# Altium PCB STM32F051C6 Lite Development Board.PcbDoc
Units mil, origin at the board's own origin, x right, y up, seen from the top; angles counter-clockwise.
Board outline 3200.23 x 1149.97 mil, 2 copper layers (Top Layer, Bottom Layer); 16 components, 46 nets, 136 pads, 0 vias.
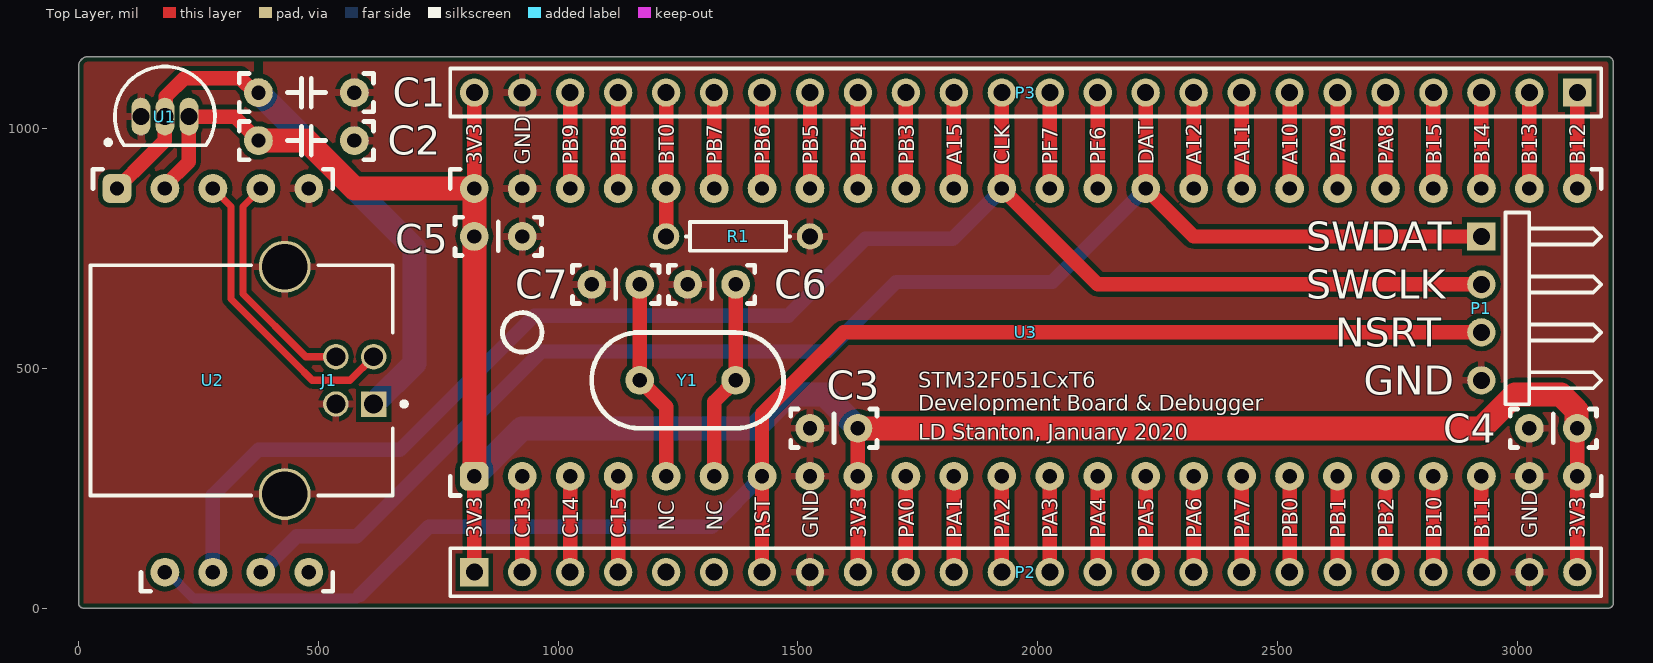
[diagram p0: Top Layer view]
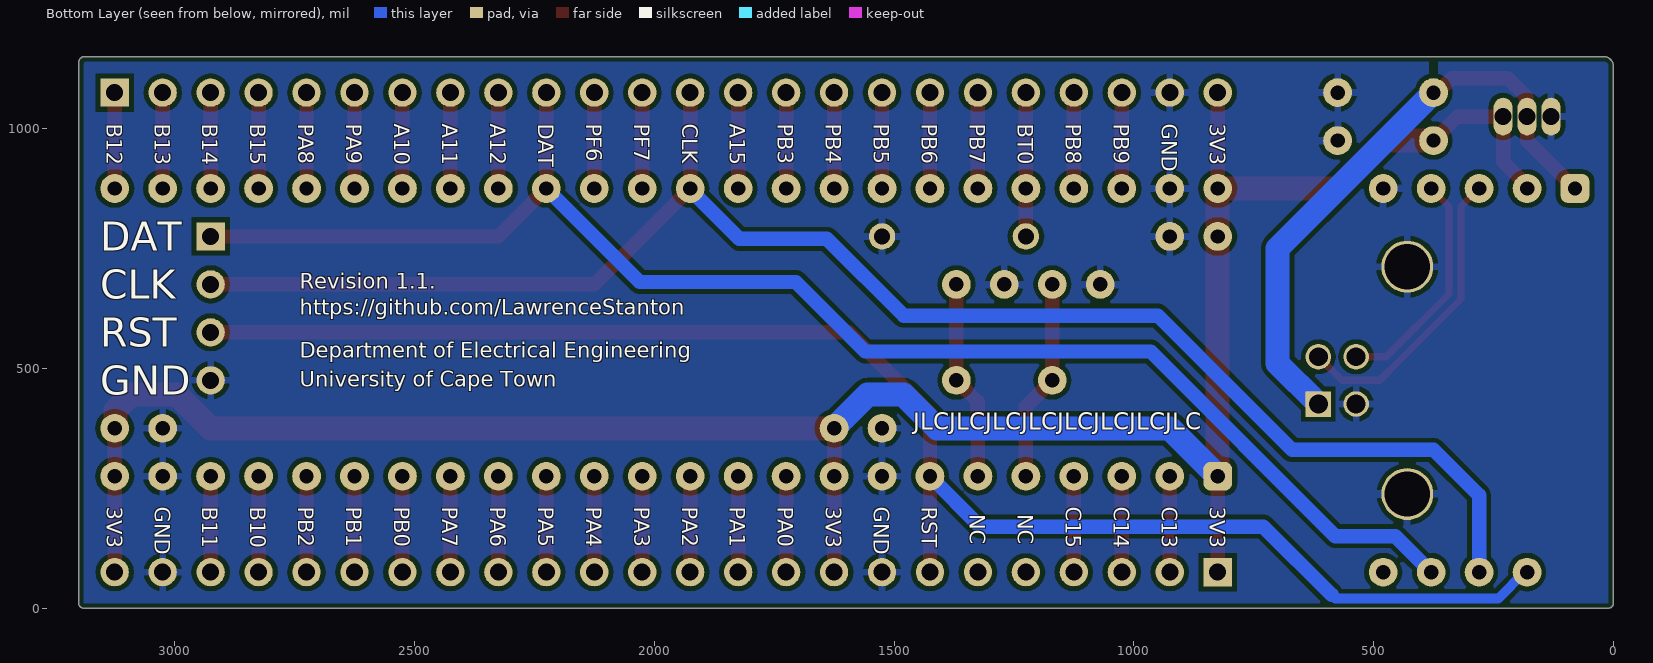
[diagram p1: Bottom Layer view, seen from below]

## Layer stack, top to bottom
Top Solder: solder mask 0.4, Solder Resist, Dk 3.5
Top Layer: signal copper 1.4
Dielectric 1: dielectric 12.6, FR-4, Dk 4.8
Bottom Layer: signal copper 1.4
Bottom Solder: solder mask 0.4, Solder Resist, Dk 3.5

## Board outline
0,10 ccw(c10,10) 10,0 3190,0 ccw(c3190,10) 3200,10 3200,1135 ccw(c3187.52,1137.48) 3190,1149.97 20,1149.97 ccw(c19.98,1129.98) 0,1130

## Design rules (kind name [scope] priority, off if disabled: settings)
BoardOutlineClearance [All] p1: gap=10 ignorepadtopadclearanceinfootprint=FALSE except(0: Arc-SplitContinuation Track-SplitContinuation SMDPad-SplitContinuation THPad-SplitContinuation Via-SplitContinuation Fill-SplitContinuation Poly-SplitContinuation Region-SplitContinuation Text-SplitContinuation)
Clearance [All] p1: gap=10 ignorepadtopadclearanceinfootprint=FALSE except(0: Arc-Text Track-Text SMDPad-Hole THPad-Hole Via-Hole Fill-Hole Poly-Hole Region-Hole Text-Hole; 1: Text-Text; 3: THPad-Text Via-Text; 5: Arc-THPad Arc-Hole Track-THPad Track-Hole Fill-Text Poly-Text Region-Text)
ComponentClearance [All] p1 off: gap=9 collisioncheckmode=3 verticalgap=0 showdistances=FALSE
DiffPairsRouting [All] p1: maxlimit=10 minlimit=10 mostfreqgap=10 toplayer_minwidth=15 toplayer_maxwidth=15 toplayer_prefwidth=15 bottomlayer_minwidth=15 bottomlayer_maxwidth=15 bottomlayer_prefwidth=15 maxuncoupledlength=500
Height [All] p1 off: minheight=0 maxheight=1000 prefheight=500
HoleSize [All] p1: absolutevalues=TRUE maxlimit=248.03 minlimit=7.87 maxpercent=80.000 minpercent=20.000
MinimumAnnularRing [All] p1: minimumring=3
PermittedLayers [All] p1: toplayerpermitted=TRUE bottomlayerpermitted=FALSE
PlaneConnect [All] p1: planeconnectstyle=Relief reliefexpansion=20 reliefentries=4 reliefconductorwidth=20 reliefairgap=10
PolygonConnect [All] p1: connectstyle=Relief reliefconductorwidth=15 reliefentries=4 polygonreliefangle="90 Angle" airgapwidth=10
RoutingCorners [All] p1: cornerstyle=Round minsetback=100 maxsetback=100
RoutingTopology [All] p1: topology=Starburst
RoutingVias [All] p1: holewidth=28 width=50 viastyle="Through Hole" minholewidth=11.81 minwidth=17.72 maxholewidth=28 maxwidth=50
SilkToSolderMaskClearance [IsPad] p1: minsilkscreentomaskgap=9 clearancetoexposedcopper=TRUE
SolderMaskExpansion [All] p1: expansion=4 istentingtop=FALSE
UnRoutedNet [All] p1: checkbadconnections=TRUE
Width [All] p1: maxlimit=50 minlimit=5 preferedwidth=30 minimp=50.000000 maximp=50.000000 favimp=50.000000
21 further rules are at their usual default settings.

## Classes and differential pairs
differential pair USB: +USB_P -USB_N

## Components (designator, comment, footprint, x,y, rotation, side; value= is the part's Value field where it differs from the comment)
C1 "Ceramic Capacitor" "200MIL CAPACITOR THT" 475,1075 r270 top locked value=1uF
C2 "Ceramic Capacitor" "200MIL CAPACITOR THT" 475,975 r270 top locked value=1uF
C3 "Ceramic Capacitor" "100MIL CAPACITOR THT" 1575,375 r270 top locked value=100nF
C4 "Ceramic Capacitor" "100MIL CAPACITOR THT" 3075,375 r270 top locked value=100nF
C5 "Ceramic Capacitor" "100MIL CAPACITOR THT" 875,775 r90 top locked value=100nF
C6 "Ceramic Capacitor" "100MIL CAPACITOR THT" 1320,675 r270 top locked value=10pF
C7 "Ceramic Capacitor" "100MIL CAPACITOR THT" 1120,675 r270 top locked value=10pF
J1 "61729-0010BLF" FCI-61729-0010BLF-6_V 340,475 r270 top locked
P1 "SWD Header" HDR1X4H 2925,775 r270 top locked
P2 "Jumper Headers" HDR1X24 825,75 r0 top locked
P3 "Jumper Headers" HDR1X24 3125,1075 r180 top locked
R1 "BOOT PDR" AXIAL-0.3 1375,775 r0 top locked value=10K
U1 "MCP1700-3302E/TO" TO-92-TO3 180,1025 r270 top
U2 "STM32F1 Debugger" "STM DEBUGGER" 80,75 r0 top locked
U3 "STM32F051C6T6 Baracuda Breakout" "STM32F051C6T6 BARACUDA BREAKOUT" 1975,575 r0 top locked
Y1 "8MHz" "200MIL FLAT QUARTS CRYSTAL THT" 1270,475 r180 top locked

## Footprints (in the part's own frame and the unit in brackets; to place one, negate y for a bottom-side part, rotate by r counter-clockwise, add the part's x,y. Pads: shape width x height; smd on the part's side, far side on the other; paste and mask are expansions set on the pad)
"100MIL CAPACITOR THT" [mil] "100mil THT Bipolar Capacitor"
  round 60 hole 30: 1(0,50) 2(0,-50)
  silkscreen extent -40,-90 40,90
"200MIL CAPACITOR THT" [mil] "200mil THT Bipolar Capacitor"
  round 60 hole 30: 1(0,-100) 2(0,100)
  silkscreen extent -40,-140 40,140
"200MIL FLAT QUARTS CRYSTAL THT" [mil] "Standard Ovular Quarts Crystal"
  round 60 hole 30: 1(-100,0) 2(100,0)
  Top Layer pour cut-out: -150,50
  silkscreen extent -200,-100 200,100
AXIAL-0.3 [mm] "Axial Device, Thru-Hole; 2 Leads; 0.3 in Pin Spacing"
  round 1.4 hole 0.85: 1(-3.81,0) 2(3.81,0)
  silkscreen extent -2.77,-0.76 2.77,0.76
FCI-61729-0010BLF-6_V [mm] "Through Hole, 6-Leads, Body 12.2x16mm"
  rect 1.35x1.35 hole 1: 1(1.254,6.99)
  round 1.35 hole 1: 2(-1.246,6.99) 3(-1.246,4.99) 4(1.254,4.99)
  round 2.75 hole 2.4: MH1(-6.016,2.28) MH2(6.024,2.28)
  silkscreen extent -6.1,-8 6.1,8.72, body extent -7.17,-8 7.17,8, height 11.14
HDR1X4H [mm] "Connector; Header; 4 Position; Right Angle"
  rect 1.5x1.5 hole 0.9: 1(0,0)
  round 1.5 hole 0.9: 2(2.54,0) 3(5.08,0) 4(7.62,0)
  silkscreen extent -1.27,1.27 8.89,6.35
HDR1X24 [mm] "Connector; Header; 24 Position"
  rect 1.5x1.5 hole 0.9: 1(0,0)
  round 1.5 hole 0.9: 2(2.54,0) 3(5.08,0) 4(7.62,0) 5(10.16,0) 6(12.7,0) 7(15.24,0) 8(17.78,0) 9(20.32,0) 10(22.86,0) 11(25.4,0) 12(27.94,0) 13(30.48,0) 14(33.02,0) 15(35.56,0) 16(38.1,0) 17(40.64,0) 18(43.18,0) 19(45.72,0) 20(48.26,0) 21(50.8,0) 22(53.34,0) 23(55.88,0) 24(58.42,0)
  silkscreen extent -1.27,-1.27 59.69,1.27
"STM32F051C6T6 BARACUDA BREAKOUT" [mil] "Breakout Board Footprint for STN32F051C6T6"
  rrect50% 60x60 hole 30: 1(-1150,-300)
  round 60 hole 30: 2(-1050,-300) 3(-950,-300) 4(-850,-300) 5(-750,-300) 6(-650,-300) 7(-550,-300) 8(-450,-300) 9(-350,-300) 10(-250,-300) 11(-150,-300) 12(-50,-300) 13(50,-300) 14(150,-300) 15(250,-300) 16(350,-300) 17(450,-300) 18(550,-300) 19(650,-300) 20(750,-300) 21(850,-300) 22(950,-300) 23(1050,-300) 24(1150,-300) 25(1150,300) 26(1050,300) 27(950,300) 28(850,300) 29(750,300) 30(650,300) 31(550,300) 32(450,300) 33(350,300) 34(250,300) 35(150,300) 36(50,300) 37(-50,300) 38(-150,300) 39(-250,300) 40(-350,300) 41(-450,300) 42(-550,300) 43(-650,300) 44(-750,300) 45(-850,300) 46(-950,300) 47(-1050,300) 48(-1150,300)
  silkscreen extent -1200,-340 1200,340
"STM DEBUGGER" [mil] "STM32F1 Debugger Module"
  rrect50% 60x60 hole 30: 1(0,800)
  round 60 hole 30: 2(100,800) 3(200,800) 4(300,800) 5(400,800) 6(100,0) 7(200,0) 8(300,0) 9(400,0)
  silkscreen extent -50,-40 450,840
TO-92-TO3 [mm] "TO, Flat Index; 3 In-Line, Axial Leads; Body Dia. 4.8mm; Leads 0.56 x 0.53 mm (max)"
  oval 2x1 hole 0.9: 1(0,-1.27) 2(0,0) 3(0,1.27)
  silkscreen extent -2.65,-3.13 1.52,2.65, body extent -2.65,-2.66 1.52,2.66, height 5.33

## Part data
C1 C2 C3 C4 C5 C6 C7: library part Cap, "Capacitor", LatestRevisionDate=17-Jul-2002, LatestRevisionNote="Re-released for DXP Platform.", PackageDescription="Radial Cap, Thru-Hole; 2 Leads; 0.3 in Pin Spacing", PackageReference=RAD-0.3, Published=8-Jun-2000, Publisher="Altium Limited"
J1: library part CMP-0397-00002-2, "Single USB 2.0, B Type, Right Angle Jack, Through Hole, RoHS, Tube", Manufacturer="FCI Electronics", ComponentLink1Description="Manufacturer URL", ComponentLink1URL=http://portal.fciconnect.com/, ComponentLink2Description=Datasheet, ComponentLink2URL=http://portal.fciconnect.com/Comergent//fci/drawing/61729.pdf, ComponentLink3Description="Package Specification", ComponentLink3URL=http://portal.fciconnect.com/Comergent//fci/drawing/61729.pdf, Connector Type=USB-B, DatasheetVersion="Rev. V", Gender=Receptacle, Mounting Technology="Through Hole", Number of Contacts=4, PackageDescription="6-Pin, Through Hole, Body 12.2 x 16 mm", PackageReference=61729-0010BLF, Packing=Tube, PartNumber=61729-0010BLF, RoHS=TRUE, Specifications="USB 2.0"
P1: library part "Header 4H", "Header, 4-Pin, Right Angle", LatestRevisionDate=17-Jul-2002, LatestRevisionNote="Re-released for DXP Platform.", Publisher="Altium Limited"
P2 P3: library part "Header 24", "Header, 24-Pin", LatestRevisionDate=17-Jul-2002, LatestRevisionNote="Re-released for DXP Platform.", Publisher="Altium Limited"
R1: library part Res1, "Resistor", LatestRevisionDate=17-Jul-2002, LatestRevisionNote="Re-released for DXP Platform.", PackageDescription="Axial Device, Thru-Hole; 2 Leads; 0.3 in Pin Spacing", PackageReference=AXIAL-0.3, Published=8-Jun-2000, Publisher="Altium Limited"
U1: "Low Quiescent Current LDO, 3-Pin TO-92, Extended TemperatureBAG", Supplier Part Number 1=MCP1700-3302E/TO-ND, ComponentLink1Description=Datasheet, ComponentLink1URL=http://ww1.microchip.com/downloads/en/DeviceDoc/21826b.pdf, ComponentLink2Description="Packaging Specification", ComponentLink2URL=http://www.microchip.com/stellent/groups/techpub_sg/documents/packagingspec/en012702.pdf, ComponentLink3Description="Microchip.com Home", ComponentLink3URL=http://www.microchip.com/, DatasheetVersion="revB, Feb-2007", PackageDescription="3-Lead Plastic Transistor Outline (TO) [TO-92]", PackageReference=TO-92-TO3, PackageVersion="revBB, Aug-2009", Published=29-Jan-2009, Publisher="Altium Limited", Supplier 1=Digi-Key, Supplier 2=Farnell, Supplier Part Number 2=1296588
Y1: library part XTAL, "Crystal Oscillator", LatestRevisionDate=17-Jul-2002, LatestRevisionNote="Re-released for DXP Platform.", PackageDescription="Crystal, Thru-Hole; 2 Leads; Body 3.1 x 8.2 mm (Dia.xH)", PackageReference=R38, Published=8-Jun-2000, Publisher="Altium Limited"

## Nets (pads, with @x,y where several pads share a name; then routed paths per layer and width w, separated by ;. In a path a pad name is that pad's centre, name@x,y a point inside that pad or via, vN(x,y) a via of type N, cw(c..) or ccw(c..) an arc to the next point about the centre after c; other vN are vias at no path point)
+3V3: C2.1 C3.1 C4.1 C5.1 P2.1 P2.9 P2.24 P3.24 U1.3 U2.2 U3.1 U3.9 U3.24 U3.48 | length 4906.2
  Top Layer w30: U2.2 180,881.07 230,931.07 U1.3 325,1025 C2.1 ; P2.1 U3.1 ; U3.48 P3.24 ; P2.9 U3.9 C3.1 ; P2.24 U3.24 C4.1
  Top Layer w50: C2.1 475,975 575,875 U3.48 C5.1 U3.1 ; C3.1 2925,375 2995,445 3090.71,445 3123.09,412.62 C4.1@3123.09,376.91
  Bottom Layer w50: U3.1 925,375 1410,375 1480,445 1555,445 C3.1 ; C4.1@3123.09,376.91 C4.1
+5: C1.1 J1.1 U1.2 U2.1 | length 1274.5
  Top Layer w30: U2.1 145,940 179.42,974.42 179.42,1024.42 U1.2 181.79,1026.79 181.79,1066.79 220,1105 336.88,1105 366.88,1075 C1.1
  Bottom Layer w50: C1.1 700,750 700,510.43 J1.1
BOOT0: P3.20 R1.1 U3.44 | length 275
  Top Layer w30: R1.1 U3.44 P3.20@1225,1050
GND: C1.2 C2.2 C3.2 C4.2 C5.2 C6.2 C7.2 J1.4 J1.MH1 J1.MH2 P1.4 P2.8 P2.23 P3.23 R1.2 U1.1 U2.5 U3.8 U3.23 U3.47
NSRT: P1.3 P2.7 U2.6 U3.7 | length 3274.2
  Top Layer w30: P2.7 U3.7 1425,405 1595,575 P1.3
  Bottom Layer w20: U2.6@180,76 184,76 240,20 580,20 587.5,27.5
  Bottom Layer w30: 587.5,27.5 730,170 1320,170 U3.7
OSC_IN: C7.1 U3.5 Y1.2 | length 422.8
  Top Layer w30: C7.1 Y1.2 1225,420 U3.5
OSC_OUT: C6.1 U3.6 Y1.1 | length 418.6
  Top Layer w30: U3.6 1325,430 Y1.1 C6.1
PA0: P2.10 U3.10 | length 200
  Top Layer w30: P2.10 U3.10
PA1: P2.11 U3.11 | length 200
  Top Layer w30: P2.11 U3.11
PA2: P2.12 U3.12 | length 200
  Top Layer w30: P2.12 U3.12
PA3: P2.13 U3.13 | length 200
  Top Layer w30: P2.13 U3.13
PA4: P2.14 U3.14 | length 200
  Top Layer w30: P2.14 U3.14
PA5: P2.15 U3.15 | length 200
  Top Layer w30: P2.15 U3.15
PA6: P2.16 U3.16 | length 200
  Top Layer w30: P2.16 U3.16
PA7: P2.17 U3.17 | length 200
  Top Layer w30: P2.17 U3.17
PA8: P3.5 U3.29 | length 175
  Top Layer w30: U3.29 P3.5@2725,1050
PA9: P3.6 U3.30 | length 175
  Top Layer w30: U3.30 P3.6@2625,1050
PA10: P3.7 U3.31 | length 175
  Top Layer w30: U3.31 P3.7@2525,1050
PA11: P3.8 U3.32 | length 175
  Top Layer w30: U3.32 P3.8@2425,1050
PA12: P3.9 U3.33 | length 175
  Top Layer w30: U3.33 P3.9@2325,1050
PA15: P3.14 U3.38 | length 175
  Top Layer w30: U3.38 P3.14@1825,1050
PB0: P2.18 U3.18 | length 200
  Top Layer w30: P2.18 U3.18
PB1: P2.19 U3.19 | length 200
  Top Layer w30: P2.19 U3.19
PB2: P2.20 U3.20 | length 200
  Top Layer w30: P2.20 U3.20
PB3: P3.15 U3.39 | length 175
  Top Layer w30: U3.39 P3.15@1725,1050
PB4: P3.16 U3.40 | length 175
  Top Layer w30: U3.40 P3.16@1625,1050
PB5: P3.17 U3.41 | length 175
  Top Layer w30: U3.41 P3.17@1525,1050
PB6: P3.18 U3.42 | length 175
  Top Layer w30: U3.42 P3.18@1425,1050
PB7: P3.19 U3.43 | length 175
  Top Layer w30: U3.43 P3.19@1325,1050
PB8: P3.21 U3.45 | length 175
  Top Layer w30: U3.45 P3.21@1125,1050
PB9: P3.22 U3.46 | length 175
  Top Layer w30: U3.46 P3.22@1025,1050
PB10: P2.21 U3.21 | length 200
  Top Layer w30: P2.21 U3.21
PB11: P2.22 U3.22 | length 200
  Top Layer w30: P2.22 U3.22
PB12: P3.1 U3.25 | length 175
  Top Layer w30: U3.25 P3.1@3125,1050
PB13: P3.2 U3.26 | length 175
  Top Layer w30: U3.26 P3.2@3025,1050
PB14: P3.3 U3.27 | length 175
  Top Layer w30: U3.27 P3.3@2925,1050
PB15: P3.4 U3.28 | length 175
  Top Layer w30: U3.28 P3.4@2825,1050
PC13: P2.2 U3.2 | length 200
  Top Layer w30: P2.2 U3.2
PC14: P2.3 U3.3 | length 200
  Top Layer w30: P2.3 U3.3
PC15: P2.4 U3.4 | length 200
  Top Layer w30: P2.4 U3.4
PF6: P3.11 U3.35 | length 175
  Top Layer w30: U3.35 P3.11@2125,1050
PF7: P3.12 U3.36 | length 175
  Top Layer w30: U3.36 P3.12@2025,1050
SWCLK: P1.2 P3.13 U2.7 U3.37 | length 3354.4
  Top Layer w30: P3.13 U3.37 2125,675 P1.2
  Bottom Layer w30: U2.7 280,235 375,330 670,330 950,610 1480,610 1640,770 1822.43,770 1925,872.57 U3.37
SWDAT: P1.1 P3.10 U2.8 U3.34 | length 3117.8
  Top Layer w30: P3.10 U3.34 2325,775 P1.1
  Bottom Layer w30: U2.8 455,150 580,150 965,535 1560,535 1705,680 2030,680 U3.34
USB_N: J1.2 U2.3 | length 634.1
  Top Layer w15: U2.3 317.5,837.5 317.5,644.82 326.16,636.16 450,512.32 487.32,475 566.14,475 J1.2
USB_P: J1.3 U2.4 | length 483.6
  Top Layer w15: U2.4 342.5,837.5 342.5,655.18 473.62,524.06 J1.3
pads on no net: P2.5 P2.6 U2.9

## Polygon pours and split planes (outlines as drawn)
no net on Top Layer "Top Dead" (solid, pour order 17): 0,10 ccw(c10,10) 10,0 3190,0 ccw(c3190,10) 3200,10 3200,1135 ccw(c3187.52,1137.48) 3190,1149.97 20,1149.97 ccw(c19.98,1129.98) 0,1130
GND on Top Layer "Top Ground" (solid, remove dead copper, pour order 14): 0,10 ccw(c10,10) 10,0 3190,0 ccw(c3190,10) 3200,10 3200,1135 ccw(c3190.02,1134.98) 3190,1144.96 20,1149.97 ccw(c19.98,1129.98) 0,1130
no net on Bottom Layer "Bottom Dead" (solid, pour order 16): 0,10 ccw(c10,10) 10,0 3190,0 ccw(c3190,10) 3200,10 3200,1135 ccw(c3187.52,1137.48) 3190,1149.97 20,1149.97 ccw(c19.98,1129.98) 0,1130
GND on Bottom Layer "Bottom Ground" (solid, remove dead copper, pour order 15): 0,10 ccw(c10,10) 10,0 3190,0 ccw(c3190,10) 3200,10 3200,1135 ccw(c3190.02,1134.98) 3190,1144.96 20,1149.97 ccw(c19.98,1129.98) 0,1130

## Other copper
Top Layer:
  pour cut-out: 365,1150 385,1150 385,1080 365,1080
Bottom Layer:
  pour cut-out: 365,1080 365,1150 385,1150 385,1080

## Silkscreen, mask and mechanical layers (free items; w line width, h text height)
Top Overlay:
  circle w10: c925,575 r41.23
  text "3V3" at 842,925 h32 r90
  text "GND" at 942,925 h32 r90
  text "PB9" at 1042,925 h32 r90
  text "PB8" at 1142,925 h32 r90
  text "BT0" at 1242,925 h32 r90
  text "PB7" at 1342,925 h32 r90
  text "PB6" at 1442,925 h32 r90
  text "PB5" at 1542,925 h32 r90
  text "PB4" at 1642,925 h32 r90
  text "PB3" at 1742,925 h32 r90
  text "A15" at 1842,925 h32 r90
  text "CLK" at 1942,925 h32 r90
  text "PF7" at 2042,925 h32 r90
  text "PF6" at 2142,925 h32 r90
  text "DAT" at 2242,925 h32 r90
  text "A12" at 2342,925 h32 r90
  text "A11" at 2442,925 h32 r90
  text "A10" at 2542,925 h32 r90
  text "PA9" at 2642,925 h32 r90
  text "PA8" at 2742,925 h32 r90
  text "B15" at 2842,925 h32 r90
  text "B14" at 2942,925 h32 r90
  text "B13" at 3042,925 h32 r90
  text "B12" at 3142,925 h32 r90
  text "SWDAT" at 2560,745 h60
  text "SWCLK" at 2560,645 h60
  text "NSRT" at 2620,545 h60
  text "STM32F051CxT6" at 1751,460 h32
  text "GND" at 2680,445 h60
  text "Development Board & Debugger" at 1751,411.66 h32
  text "LD Stanton, January 2020" at 1751,350.66 h32
  text "NC" at 1242,161 h32 r90
  text "NC" at 1342,161 h32 r90
  text "3V3" at 842,146 h32 r90
  text "C13" at 942,146 h32 r90
  text "C14" at 1042,146 h32 r90
  text "C15" at 1142,146 h32 r90
  text "RST" at 1442,146 h32 r90
  text "GND" at 1542,146 h32 r90
  text "3V3" at 1642,146 h32 r90
  text "PA0" at 1742,146 h32 r90
  text "PA1" at 1842,146 h32 r90
  text "PA2" at 1942,146 h32 r90
  text "PA3" at 2042,146 h32 r90
  text "PA4" at 2142,146 h32 r90
  text "PA5" at 2242,146 h32 r90
  text "PA6" at 2342,146 h32 r90
  text "PA7" at 2442,146 h32 r90
  text "PB0" at 2542,146 h32 r90
  text "PB1" at 2642,146 h32 r90
  text "PB2" at 2742,146 h32 r90
  text "B10" at 2842,146 h32 r90
  text "B11" at 2942,146 h32 r90
  text "GND" at 3042,146 h32 r90
  text "3V3" at 3142,146 h32 r90
Bottom Overlay:
  text "3V3" at 842,1010 h32 r90
  text "GND" at 942,1010 h32 r90
  text "PB9" at 1042,1010 h32 r90
  text "PB8" at 1142,1010 h32 r90
  text "BT0" at 1242,1010 h32 r90
  text "PB7" at 1342,1010 h32 r90
  text "PB6" at 1442,1010 h32 r90
  text "PB5" at 1542,1010 h32 r90
  text "PB4" at 1642,1010 h32 r90
  text "PB3" at 1742,1010 h32 r90
  text "A15" at 1842,1010 h32 r90
  text "CLK" at 1942,1010 h32 r90
  text "PF7" at 2042,1010 h32 r90
  text "PF6" at 2142,1010 h32 r90
  text "DAT" at 2242,1010 h32 r90
  text "A12" at 2342,1010 h32 r90
  text "A11" at 2442,1010 h32 r90
  text "A10" at 2542,1010 h32 r90
  text "PA9" at 2642,1010 h32 r90
  text "PA8" at 2742,1010 h32 r90
  text "B15" at 2842,1010 h32 r90
  text "B14" at 2942,1010 h32 r90
  text "B13" at 3042,1010 h32 r90
  text "B12" at 3142,1010 h32 r90
  text "DAT" at 3155,745 h60
  text "Revision 1.1." at 2739,666 h32
  text "CLK" at 3155,645 h60
  text "https://github.com/LawrenceStanton" at 2739,611.66 h32
  text "RST" at 3155,545 h60
  text "Department of Electrical Engineering" at 2739,521.66 h32
  text "University of Cape Town" at 2739,461.66 h32
  text "GND" at 3155,445 h60
  text "JLCJLCJLCJLCJLCJLCJLCJLC" at 1460.11,360.64 h60
  text "3V3" at 842,211 h32 r90
  text "C13" at 942,211 h32 r90
  text "C14" at 1042,211 h32 r90
  text "C15" at 1142,211 h32 r90
  text "RST" at 1442,211 h32 r90
  text "GND" at 1542,211 h32 r90
  text "3V3" at 1642,211 h32 r90
  text "PA0" at 1742,211 h32 r90
  text "PA1" at 1842,211 h32 r90
  text "PA2" at 1942,211 h32 r90
  text "PA3" at 2042,211 h32 r90
  text "PA4" at 2142,211 h32 r90
  text "PA5" at 2242,211 h32 r90
  text "PA6" at 2342,211 h32 r90
  text "PA7" at 2442,211 h32 r90
  text "PB0" at 2542,211 h32 r90
  text "PB1" at 2642,211 h32 r90
  text "PB2" at 2742,211 h32 r90
  text "B10" at 2842,211 h32 r90
  text "B11" at 2942,211 h32 r90
  text "GND" at 3042,211 h32 r90
  text "3V3" at 3142,211 h32 r90
  text "NC" at 1242,196 h32 r90
  text "NC" at 1342,196 h32 r90
Mechanical 1:
  lines w47.24: -23.62,10 ccw(c10,10) 10,-23.62 ; -23.62,10 ccw(c10,10) 10,-23.62 ; -23.62,10 -23.62,1130 ; -23.62,10 -23.62,10 ; -23.62,10 -23.62,10 ; -23.62,10 -23.62,1130 ; -23.62,10 -23.62,10 ; -23.62,10 -23.62,10 ; -23.62,1130.02 ccw(c0,1130) -23.62,1130 ; -23.62,1130.02 ccw(c0,1130) -23.62,1130 ; -23.62,1130.02 cw(c19.98,1129.98) 19.92,1173.59 ; -23.62,1130.02 ccw(c0,1130) -23.62,1130 ; -23.62,1130.02 ccw(c0,1130) -23.62,1130 ; -23.62,1130.02 cw(c19.98,1129.98) 19.92,1173.59 ; -23.62,1130 cw(c0,1130) -23.48,1132.6 ; -23.62,1130 cw(c0,1130) -23.48,1132.6 ; -23.62,1130 -23.62,4 ccw(c0,4) -23.48,1.39 ccw(c4.5,4.5) 5.75,-23.62 3190,-23.62 ; -23.48,1132.6 cw(c22.46,1127.51) 26.12,1173.59 3188.61,1168.58 ; 10,-23.62 3190,-23.62 ; 10,-23.62 3190,-23.62 ; 19.92,1173.59 cw(c20,1149.97) 20.04,1173.59 ; 19.92,1173.59 cw(c19.98,1129.98) 20.02,1173.59 ; 19.92,1173.59 cw(c20,1149.97) 20.04,1173.59 ; 19.92,1173.59 cw(c19.98,1129.98) 20.02,1173.59 ; 20.02,1173.59 cw(c20,1149.97) 20.04,1173.59 ; 20.02,1173.59 cw(c20,1149.97) 20.04,1173.59 ; 20.04,1173.59 3190.04,1168.58 ; 20.04,1173.59 3190.04,1168.58 ; 3188.61,1168.58 cw(c3190,1145) 3190.12,1168.62 ; 3188.62,1168.58 cw(c3190,1145) 3190,1168.62 cw(c3190,1135) 3190.12,1168.62 ; 3188.61,1168.58 3188.62,1168.58 ; 3190,-23.62 ccw(c3190,10) 3223.62,9.88 ; 3190,-23.62 ccw(c3190,10) 3190,-23.62 ; 3190,-23.62 ccw(c3190,10) 3223.62,9.88 ; 3190,-23.62 ccw(c3190,10) 3190,-23.62 ; 3190,-23.62 ccw(c3190,0) 3190,-23.62 ; 3190,-23.62 ccw(c3190,10) 3223.62,9.88 ; 3190,-23.62 ccw(c3190,0) 3190,-23.62 ; 3190,-23.62 3190,-23.62 ; 3190,-23.62 3190,-23.62 ; 3190,-23.62 3190,-23.62 ; 3190.04,1168.58 ccw(c3190.02,1134.98) 3189.95,1168.58 cw(c3190.02,1134.98) 3190.04,1168.58 ; 3190.04,1168.58 cw(c3190.02,1134.98) 3223.62,1135.05 ; 3190.04,1168.58 cw(c3190.02,1134.98) 3223.62,1135.05 ; 3190.04,1168.58 3190.04,1168.58 ; 3190.04,1168.58 3190.04,1168.58 ; 3190.12,1168.62 cw(c3190,1135) 3223.62,1135.13 ; 3223.62,9.88 ccw(c3190,10) 3223.62,10 ; 3223.62,9.88 ccw(c3200,10) 3223.62,10 ; 3223.62,9.88 ccw(c3190,10) 3223.62,10 ; 3223.62,9.88 ccw(c3200,10) 3223.62,10 ; 3223.62,9.88 ccw(c3190,10) 3223.62,10 ; 3223.62,9.88 ccw(c3200,10) 3223.62,10 ; 3223.62,10 ccw(c3190,10) 3223.62,10.01 ; 3223.62,10 ccw(c3190,10) 3223.62,10 ; 3223.62,10 ccw(c3190,10) 3223.62,10.01 ; 3223.62,10 ccw(c3190,10) 3223.62,10 ; 3223.62,10 ccw(c3190,10) 3223.62,10 ; 3223.62,10 ccw(c3190,10) 3223.62,10 ; 3223.62,10 3223.62,1135 ; 3223.62,10 3223.62,1135 ; 3223.62,10 3223.62,1135 ; 3223.62,1135 ccw(c3200,1135) 3223.62,1135.05 ; 3223.62,1135 ccw(c3200,1135) 3223.62,1135.05 ; 3223.62,1135 ccw(c3200,1135) 3223.62,1135.05 ; 3223.62,1135 ccw(c3200,1135) 3223.62,1135.05 ; 3223.62,1135 ccw(c3190,1135) 3223.62,1135.13 ; 3223.62,1135 ccw(c3200,1135) 3223.62,1135.13 ; 3223.62,1135 ccw(c3200,1135) 3223.62,1135